# Altium PCB FlowSense-RX.PcbDoc
Units mil, origin at the board's own origin, x right, y up, seen from the top; angles counter-clockwise.
Board outline 1180.62 x 1020.62 mil, 2 copper layers (L1, L2), stack 62.8 mil thick; 31 components, 24 nets, 145 pads, 44 vias.
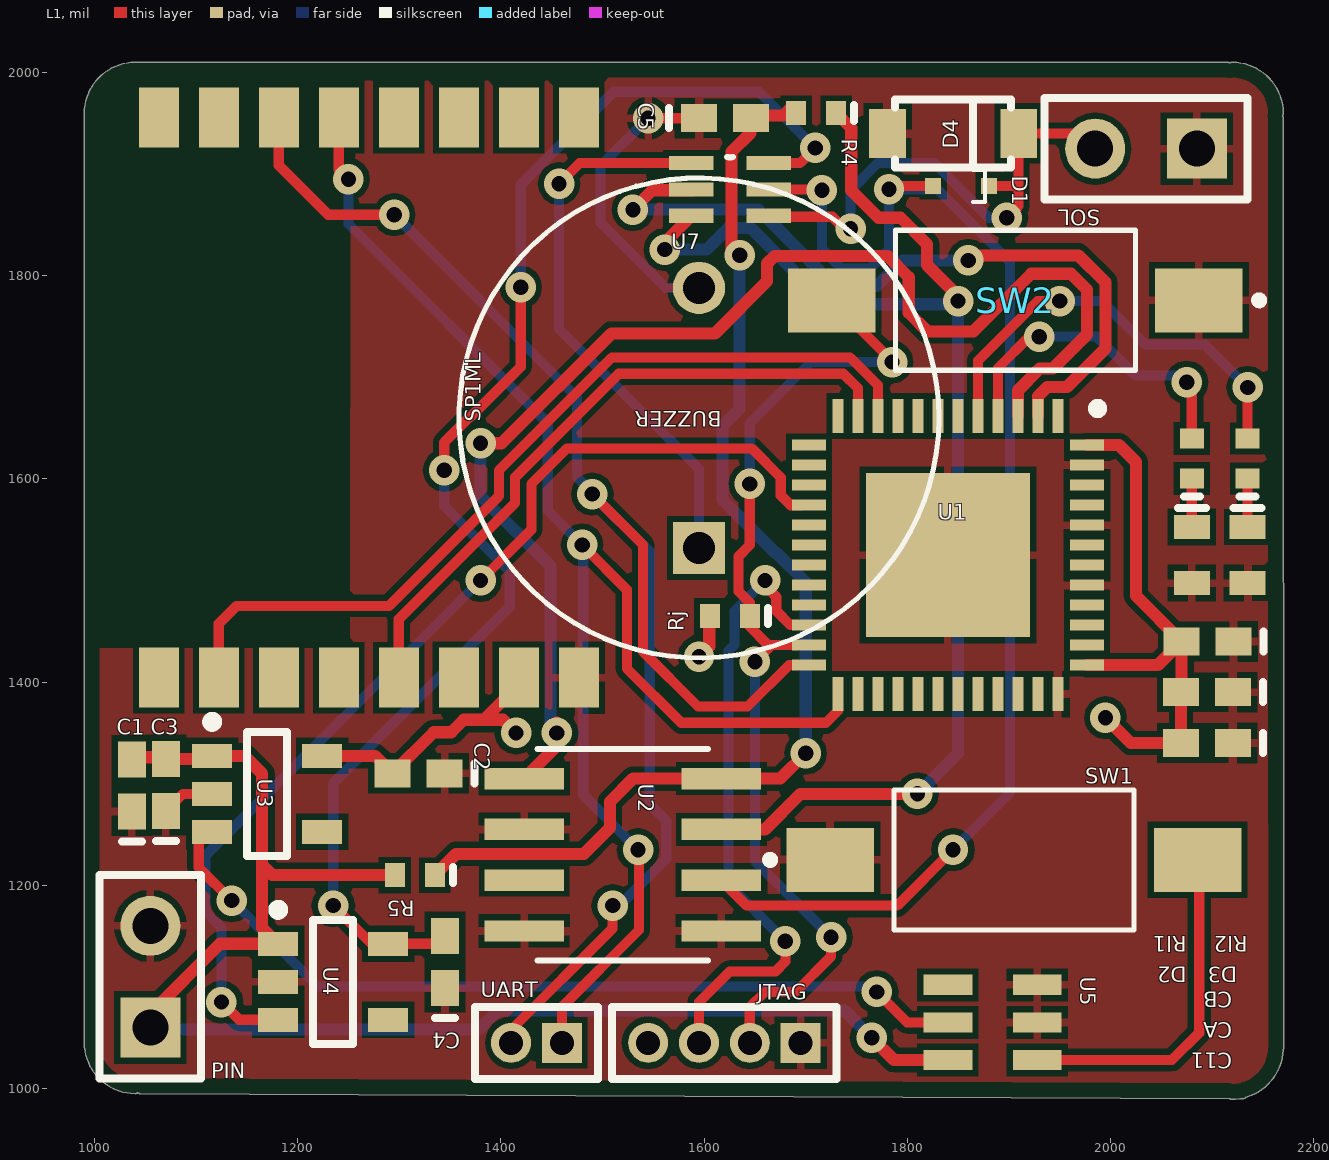
[diagram p0: L1 view]
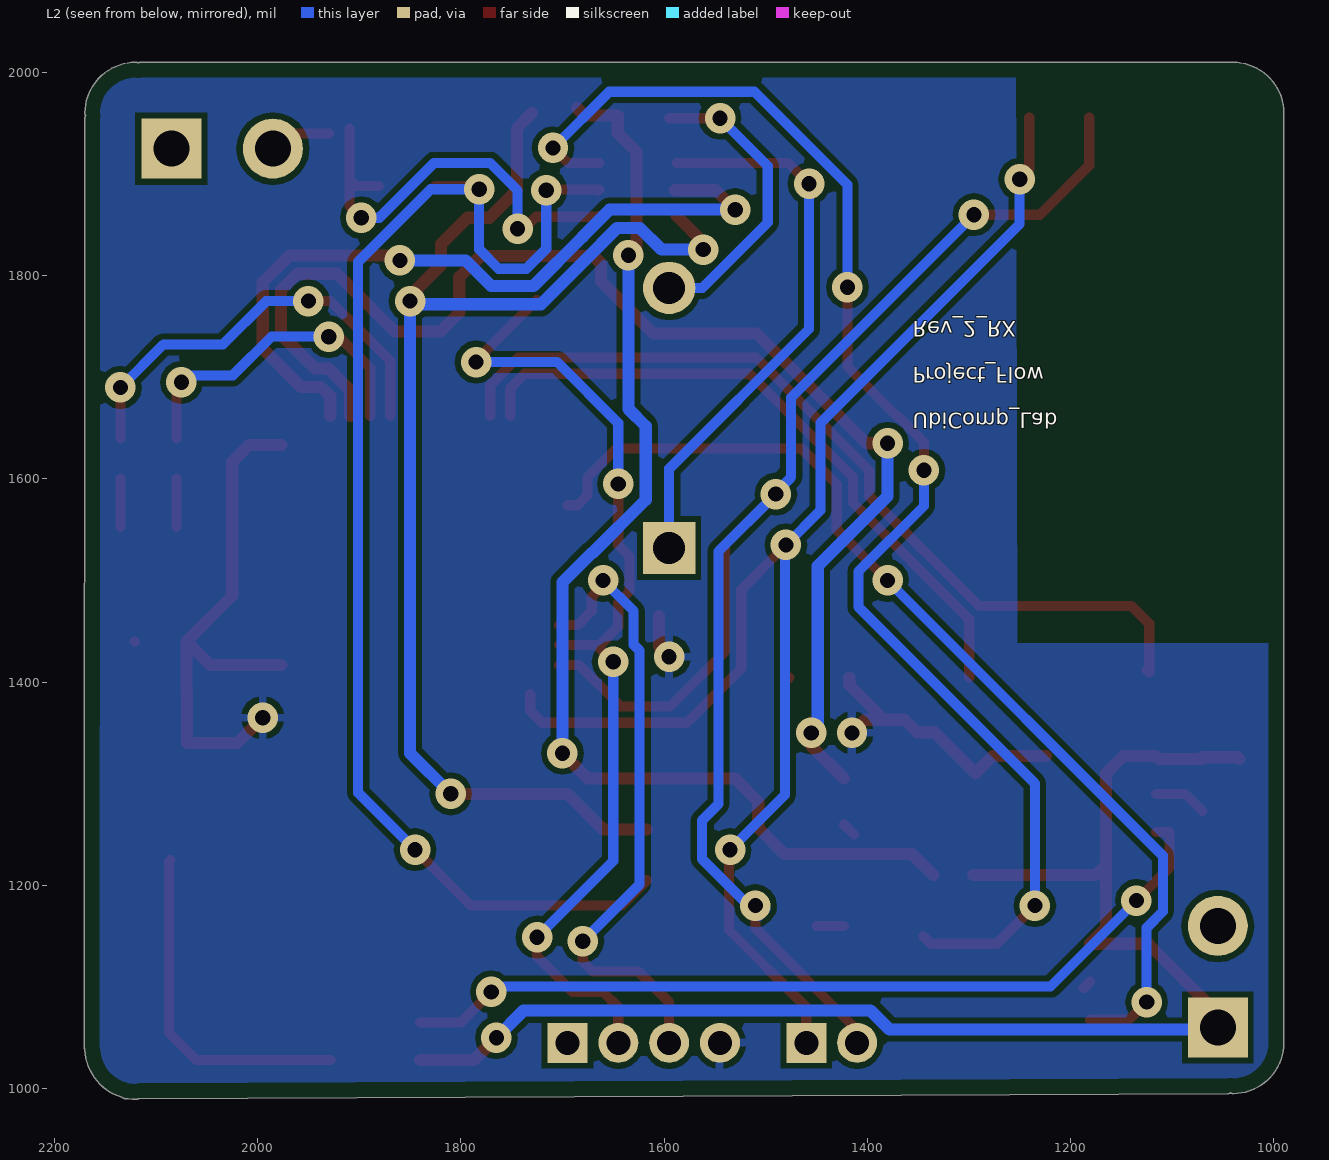
[diagram p1: L2 view, seen from below]

## Layer stack, top to bottom
Top Solder: solder mask 0.1, Solder Resist, Dk 0
L1: signal copper 1.4
Core: dielectric 60, FR-4, Dk 4.6
L2: signal copper 1.4
Bottom Solder: solder mask 0.1, Solder Resist, Dk 0

## Board outline
1040,994.99 ccw(c1040,1000) 1042.5,995.65 ccw(c1045,1000) 1044.98,994.99 2116.95,990.05 ccw(c2119.41,994.41) 2119.41,989.4 ccw(c2119.41,1040) 2127.18,990 2129.98,989.99 ccw(c2130,995) 2133.49,991.4 ccw(c2119.41,1040) 2169.98,1038.17 ccw(c2165.59,1040.59) 2170.6,1040.59 ccw(c2165.59,1040.59) 2170.6,1040.59 2170.01,1955 ccw(c2165,1955) 2169.35,1957.5 ccw(c2165,1960) 2170.01,1960 ccw(c2120,1960) 2120,2010.02 ccw(c2120,2005) 2117.5,2009.35 ccw(c2115,2005) 2115,2010.02 1040,2010.02 ccw(c1040,1960) 989.99,1960 989.99,1045 ccw(c1040,1045)

## Design rules (kind name [scope] priority, off if disabled: settings)
BoardOutlineClearance [All] p1: gap=15 ignorepadtopadclearanceinfootprint=FALSE
Clearance [All] p1: gap=6 ignorepadtopadclearanceinfootprint=FALSE except(0: Arc-Hole Track-Hole SMDPad-Hole THPad-Hole Via-Hole Fill-Hole Poly-Hole Region-Hole Text-Hole)
ComponentClearance [All] p1: gap=1 collisioncheckmode=3 verticalgap=1 showdistances=FALSE
DiffPairsRouting [All] p1: maxlimit=393.7 minlimit=6 mostfreqgap=8 toplayer_minwidth=6 toplayer_maxwidth=15 toplayer_prefwidth=8 bottomlayer_minwidth=6 bottomlayer_maxwidth=15 bottomlayer_prefwidth=8 maxuncoupledlength=500
HoleSize [All] p1: absolutevalues=TRUE maxlimit=265 minlimit=13 maxpercent=80.000 minpercent=20.000
HoleToHoleClearance [All] p1: gap=10 allowstackedmicrovias=FALSE
MinimumAnnularRing [All] p1: minimumring=7
MinimumSolderMaskSliver [All] p1: minsoldermaskwidth=0
PlaneClearance [All] p1: clearance=10
PlaneConnect [All] p1: planeconnectstyle=Direct reliefexpansion=16 reliefentries=4 reliefconductorwidth=6 reliefairgap=6
PolygonConnect [All] p1: connectstyle=Relief reliefconductorwidth=8 reliefentries=4 polygonreliefangle="90 Angle" airgapwidth=6
RoutingCorners [All] p1: cornerstyle=45-Degree minsetback=49.21 maxsetback=49.21
RoutingVias [All] p1: holewidth=15 width=30 viastyle="Through Hole" minholewidth=13 minwidth=27 maxholewidth=100 maxwidth=114
SilkToSilkClearance [All] p1: silktosilkclearance=0
SilkToSolderMaskClearance [IsPad] p1: minsilkscreentomaskgap=6 clearancetoexposedcopper=TRUE
SolderMaskExpansion [All] p1: expansion=2.95
Width [All] p1: maxlimit=400 minlimit=6 preferedwidth=8
20 further rules are at their usual default settings.

## Classes and differential pairs
component class peripheral: C1 C2 C3 C4 C5 D1 D4 PIN R4 R5 SOL SP1ML SW1 U2 U3 U4 U5 UART
component class MSP430: BUZZER C11 CA CB D2 D3 JTAG Rj Rl1 Rl2 SW2 U1 U7

## Components (designator, comment, footprint, x,y, rotation, side; value= is the part's Value field where it differs from the comment)
BUZZER "MCKPM-G1201A-K4037" XDCR_MCKPM-G1201A-K4037 1595,1660 r90 top locked
C1 "Cap" 0402-W 1036.7,1298.2 r90 top value=1u
C2 "Cap" 0402-W 1319,1310.22 r180 top value=100pF
C3 "Cap" 0402-W 1070.3,1298.71 r90 top value=1u
C4 "Cap" 0402-W 1345,1124.41 r90 top value=2.2u
C5 "Cap" 0402-W 1620.59,1955 r0 top value=100uF
C11 "Cap" 0402-W 2095,1340 r180 top value=4.7uF
CA "Cap" 0402-W 2095,1390 r180 top value=10u
CB "Cap" 0402-W 2095.59,1440 r180 top value=0.1u
D1 "Diode - Zener" SOD-523 1853.1,1888.4 r270 top
D2 "SML-311UTT86" 0603 2080,1525 r270 top
D3 "SML-311UTT86" 0603 2135,1525 r270 top
D4 "Diode" "DIODE - SOD123" 1845,1940 r0 top
JTAG "MHDR1X4" MHDR1X4 1695,1045 r180 top
PIN "Header 2" HDR1X2 1055,1060 r90 top
R4 "R_Pullup_1" 0402 1710.32,1960 r180 top value=47R
R5 "R_Pullup_1" 0402 1315.32,1210 r180 top value=DNP
Rj "Res" 0402 1625.32,1465 r180 top
Rl1 "Res" 0402 2080,1620 r90 top value=470
Rl2 "Res" 0402 2135,1620 r90 top value=470
SOL "Header 2" HDR1X2 2085,1925 r180 top
SP1ML "SP1ML-868" STM_SP1ML-868 1270,1680 r90 top locked
SW1 "FSMSM _1437566-3_" TE_FSMSM 1905,1225 r0 top
SW2 "FSMSM _1437566-3_" TE_FSMSM 1906.31,1775.8 r180 top
U1 "MSP430 Wolverine 48-Pin" MSP_QFN48_RGZ_PAD0 1840,1525 r270 top
U2 "LTC1154HS8TRPBF" SOIC-8_S 1520,1230 r0 top
U3 "TPS709" SOT95P280X145-5N 1170,1290 r0 top
U4 "TPS709" SOT95P280X145-5N 1235,1105 r0 top
U5 "MAX16054AZTT" 21-0114C 1884,1065 r180 top
U7 "BC857BS-7-F" SOT65P210X100-6N 1625.5,1884.9 r0 top
UART "MHDR1X2" MHDR1X2 1460,1045 r180 top

## Footprints (in the part's own frame and the unit in brackets; to place one, negate y for a bottom-side part, rotate by r counter-clockwise, add the part's x,y. Pads: shape width x height; smd on the part's side, far side on the other; paste and mask are expansions set on the pad)
21-0114C [mil]
  rect 48x20 smd: 1(-44,37) 2(-44,0) 3(-44,-37) 4(44,-37) 5(44,0) 6(44,37)
0402 [mm] "Surface Mount; Body 1 x 0.5 mm (LxW typ)"
  rect 0.5x0.6 smd: 1(-0.5,0) 2(0.5,0)
  silkscreen extent -0.95,-0.2 -0.95,0.2, body extent -0.5,-0.25 0.5,0.25, height 0.5
0402-W [mm] "Surface Mount - Wide; Body 1.0 x 0.5 mm (LxW typ)"
  rect 0.9x0.7 smd: 1(-0.65,0) 2(0.65,0)
  silkscreen extent -1.4,-0.25 -1.4,0.25, body extent -0.5,-0.25 0.5,0.25, height 0.5
0603 [mm] "Surface Mount; Body 1.6 x 0.8 mm (LxW typ)"
  rect 0.6x0.9 smd: 1(-0.7,0) 2(0.7,0)
  silkscreen extent -1.18,-0.35 -1.18,0.35, body extent -0.8,-0.4 0.8,0.4, height 0.8
"DIODE - SOD123" [mil] "SOD-123; 2 Leads; Body 2.7 x 1.6 mm, (LxW)"
  rect 36x48 smd: 1(-64.5,0) 2(64.5,0)
  silkscreen extent -57,-33 57,33, body extent -57,-33 57,33, height 91
HDR1X2 [mm] "Connector; Header; 2 Position"
  rect 1.5x1.5 hole 0.9: 1(0,0)
  round 1.5 hole 0.9: 2(2.54,0)
  silkscreen extent -1.27,-1.27 3.81,1.27
MHDR1X2 [mm] "Connector; Header; 2 Position"
  rect 1x1 hole 0.6: 1(0,0)
  round 1 hole 0.6: 2(1.27,0)
  silkscreen extent -0.9,-0.9 2.17,0.9
MHDR1X4 [mm] "Connector; Header; 4 Position"
  rect 1x1 hole 0.6: 1(0,0)
  round 1 hole 0.6: 2(1.27,0) 3(2.54,0) 4(3.81,0)
  silkscreen extent -0.9,-0.9 4.71,0.9
MSP_QFN48_RGZ_PAD0 [mm]
  rect 4.1x4.1 smd: 0(0,0)
  rect 0.85x0.28 smd: 1(-3.475,2.75) 2(-3.475,2.25) 3(-3.475,1.75) 4(-3.475,1.25) 5(-3.475,0.75) 6(-3.475,0.25) 7(-3.475,-0.25) 8(-3.475,-0.75) 9(-3.475,-1.25) 10(-3.475,-1.75) 11(-3.475,-2.25) 12(-3.475,-2.75) 25(3.475,-2.75) 26(3.475,-2.25) 27(3.475,-1.75) 28(3.475,-1.25) 29(3.475,-0.75) 30(3.475,-0.25) 31(3.475,0.25) 32(3.475,0.75) 33(3.475,1.25) 34(3.475,1.75) 35(3.475,2.25) 36(3.475,2.75)
  rect 0.28x0.85 smd: 13(-2.75,-3.475) 14(-2.25,-3.475) 15(-1.75,-3.475) 16(-1.25,-3.475) 17(-0.75,-3.475) 18(-0.25,-3.475) 19(0.25,-3.475) 20(0.75,-3.475) 21(1.25,-3.475) 22(1.75,-3.475) 23(2.25,-3.475) 24(2.75,-3.475) 37(2.75,3.475) 38(2.25,3.475) 39(1.75,3.475) 40(1.25,3.475) 41(0.75,3.475) 42(0.25,3.475) 43(-0.25,3.475) 44(-0.75,3.475) 45(-1.25,3.475) 46(-1.75,3.475) 47(-2.25,3.475) 48(-2.75,3.475)
  silkscreen extent -3.78,3.63 -3.55,3.85, body extent -3.3,-3.3 3.3,3.3, height 1
SOD-523 [mm] "SOD-523 Footprint"
  rect 0.4x0.4 smd: 1(0,0.7) 2(0,-0.7)
  silkscreen extent -0.4,0.3 0.4,0.6, body extent -0.4,-0.6 0.4,0.6, height 1
SOIC-8_S [mil]
  rect 78x21 smd: 1(-97,75) 2(-97,25) 3(-97,-25) 4(-97,-75) 5(97,-75) 6(97,-25) 7(97,25) 8(97,75)
  silkscreen extent -84,-104 84,104
SOT65P210X100-6N [mil]
  rect 44x14 smd: 1(-38,26) 2(-38,0) 3(-38,-26) 4(38,-26) 5(38,0) 6(38,26)
  silkscreen extent -3,32 3,32
SOT95P280X145-5N [mm] "SOT23, 5-Leads, Body 2.90x2.80mm, Pitch 0.95mm, IPC Medium Density"
  rect 1x0.6 smd: 1(-1.375,0.95) 2(-1.375,0) 3(-1.375,-0.95) 4(1.375,-0.95) 5(1.375,0.95)
  silkscreen extent -1.5,-1.55 0.5,1.92, body extent -0.88,-1.52 0.87,1.53, height 1.45
STM_SP1ML-868 [mm]
  rect 1.5x1 smd: 1(-7,5.25) 2(-7,3.75) 3(-7,2.25) 4(-7,0.75) 5(-7,-0.75) 6(-7,-2.25) 7(-7,-3.75) 8(-7,-5.25) 9(7,-5.25) 10(7,-3.75) 11(7,-2.25) 12(7,-0.75) 13(7,0.75) 14(7,2.25) 15(7,3.75) 16(7,5.25)
TE_FSMSM [mm]
  rect 2.19x1.6 smd: 1(-4.59,0) 2(4.59,0)
  silkscreen extent -6.2,-1.75 3,1.75
XDCR_MCKPM-G1201A-K4037 [mm]
  rect 1.308x1.308 hole 0.8: 1(-3.25,0)
  round 1.308 hole 0.8: 2(3.25,0)
  silkscreen extent -6,-6 6,6

## Part data
BUZZER: "Magnetic Buzzer And Transducer", Package=None, Availability=Unavailable, MF=Multicomp, MP=MCKPM-G1201A-K4037, Price="0.24 USD"
C1 C2 C3 C4 C5 C11 CA CB: "Ceramic Capacitor (Surface Mount)", Manufacturer="Generic Ceramic Chip Cap (TBD)"
D2 D3: "LED 630NM RED WTR CLR 0603 SMD"
D4: "General Purpose Diode"
JTAG: "Header, 4-Pin", LatestRevisionDate=17-Jul-2002, LatestRevisionNote="Re-released for DXP Platform.", Publisher="Altium Limited"
PIN SOL UART: "Header, 2-Pin", LatestRevisionDate=17-Jul-2002, LatestRevisionNote="Re-released for DXP Platform.", Publisher="Altium Limited"
R4 R5: library part Res, "Chip Resistor (Surface Mount)", Manufacturer="Generic Chip Res (TBD)", Comment_1=Res
Rj Rl1 Rl2: "Chip Resistor (Surface Mount)", Manufacturer="Generic Chip Res (TBD)"
SP1ML: "RF TXRX MODULE ISM<1GHZ CHIP ANT", Package="SMD-16 STMicroelectronics", Availability=Good, MF=STMicroelectronics, MP=SP1ML-868, Price="16.88 USD"
SW1 SW2: library part FSMSM, "FSMSM=3.5X6 SMT TACT", Package=None, Availability=Unavailable, MF="TE Connectivity", MP=FSMSM, Price=None, SnapEDA_Link=https://www.snapeda.com/parts/FSMSM/TE%20Connectivity%20/%20DEUTSCH/view-part/?ref=snap
U1: library part MSP430FR596X_586X_RGZ, "16-bit FRAM MCU"
U2: "IC MOSFET DRIVER HIGH-SIDE 8SOIC", Package="SOIC-8 Linear Technology", Availability=Unavailable, MF="Linear Technology", MP=LTC1154HS8#TRPBF, Price="2.92 USD"
U3 U4: "Ultra low power Voltage Regulator"
U5: "On/Off Controller With Debounce And +/-1", Package="TSOT-23 Maxim Integrated", Availability=Unavailable, MF="Maxim Integrated", MP=MAX16054AZT+, Price="2.94 USD", SnapEDA_Link=https://www.snapeda.com/parts/MAX16054AZT%2B/Maxim%20Integrated/view-part/?ref=snap
U7: "BC857BS Series PNP 45 V 200 mW Small Signal Transistor SMT - SOT-363", Package="SOT-363 Diodes Inc.", Availability=Good, MF="Diodes Inc.", MP=BC857BS-7-F, Price="0.08 USD", SnapEDA_Link=https://www.snapeda.com/parts/BC857BS-7-F/Diodes%20Inc./view-part/?ref=snap

## Via types
v1: diameter 30, hole 15, L1 to L2, 44 vias

## Nets (pads, with @x,y where several pads share a name; then routed paths per layer and width w, separated by ;. In a path a pad name is that pad's centre, name@x,y a point inside that pad or via, vN(x,y) a via of type N, cw(c..) or ccw(c..) an arc to the next point about the centre after c; other vN are vias at no path point)
GND: BUZZER.2 C1.1 C2.1 C3.1 C4.1 C5.1 C11.1 CA.1 CB.1 D2.2 D3.2 D4.1 JTAG.1 PIN.2 SOL.1 SP1ML.8 SW1.1 SW2.1 U1.0 U1.36 U1.41 U1.44 U1.47 U2.2 U2.4 U2.5 U3.2 U4.2 U5.2 U5.3 | length 425.4
  L1 w10: C3.1 1087.18,1290 U3.2 ; U4.2 U4.2@1187.05,1098.82 ; U2.2@1413,1250 U2.2@1423,1260 ; U2.4@1423,1160 U2.4@1450,1160 ; SP1ML.8 SP1ML.8@1481,1400.1 ; v1(1544.9,1955) C5.1 ; SOL.1@2070,1940 SOL.1@2090,1940 ; CB.1@2120.59,1439.41 CB.1
  L2 w10: v1(1544.9,1955) 1497.9,1908 1497.9,1852.33 1562.28,1787.95 BUZZER.2
LED1: Rl1.2 U1.4 | length 322
  L1 w10: U1.4 1889.21,1709.21 1920,1740 v1(1930,1740) ; v1(2075,1695) 2080,1690 Rl1.2
  L2 w10: v1(1930,1740) 1986.3,1740 2024.4,1701.9 2068.1,1701.9 v1(2075,1695)
LED2: Rl2.2 U1.5 | length 429.8
  L1 w10: U1.5 1869.53,1716.3 1928.23,1775 v1(1950,1775) ; Rl2.2 v1(2135,1690)
  L2 w10: v1(1950,1775) 1991.5,1775 2034.28,1732.22 2092.78,1732.22 v1(2135,1690)
NetBUZZER_1: BUZZER.1 U7.1 | length 554.2
  L1 w10: v1(1457.3,1890.6) 1477.6,1910.9 U7.1
  L2 w10: v1(1457.3,1890.6) 1457.3,1747.6 1595,1609.9 BUZZER.1
NetC1_2: C1.2 C3.2 PIN.1 R5.2 U3.1 U4.1 U5.6 | length 1431.4
  L1 w12: C1.2@1033.7,1324.28 1035.52,1326.1 C3.2@1070.3,1326.1 ; PIN.1 1055,1073.9 1123.5,1142.4 U4.1 1165,1158.27 1165,1220 ; C3.2 1112.76,1324.3 U3.1 1147.6,1327.4 1165,1310 1165,1220 ; R5.2 1175,1210 1165,1220 ; v1(1765,1050) 1787,1028 U5.6
  L2 w12: PIN.1 1057,1058 1378.19,1058 1396.88,1076.69 1738.31,1076.69 v1(1765,1050)
NetC5_2: C5.2 R4.2 R5.1 U2.8 | length 1167.9
  L1 w12: R5.1 1355.9,1230.9 1481.6,1230.9 1507.3,1256.6 1507.3,1282.3 1530,1305 U2.8 1675,1305 v1(1700,1330) ; v1(1635,1820) 1635,1812.59 1627,1820.59 1627,1921.97 1645.59,1940.56 1645.59,1957.76 1678.39,1957.76 R4.2@1685.63,1965
  L2 w12: v1(1635,1820) 1635,1668.84 1618,1651.84 1618,1579.4 1670.4,1527 1671.18,1527 1700,1498.18 v1(1700,1330)
NetD1_1: D1.1 D4.2 SOL.2 U7.4 | length 495.5
  L1 w10: U7.4 1664.4,1858 1726.1,1858 1737.8,1846.3 v1(1744.2,1846.3) ; D1.1 1903.6,1888.4 1909.5,1894.3 ; v1(1898,1857) 1909.5,1868.5 1909.5,1894.3 ; D4.2@1909.5,1945 D4.2 1909.5,1894.3 ; 1929.5,1940 SOL.2@1990,1940
  L2 w10: v1(1744.2,1846.3) 1744.2,1883.97 1771.23,1911 1826.33,1911 1880.33,1857 v1(1898,1857)
NetD1_2: D1.2 U2.6 U7.5 | length 1308.7
  L1 w10: U2.6 1642,1180 1790,1180 v1(1845,1235) ; U7.5 1715.1,1884.9 v1(1716,1884) ; U7.5@1665.3,1884.4 U7.5@1665.7,1884 ; v1(1782,1885) 1785.4,1888.4 D1.2
  L2 w10: v1(1716,1884) 1716,1826.4 1735.5,1806.9 1763,1806.9 1782,1825.9 v1(1782,1885) 1829.7,1885 1901.1,1813.6 1901.1,1291.1 v1(1845,1235)
NetD2_1: D2.1 Rl1.1 | length 47.8
  L1 w10: D2.1 Rl1.1
NetD3_1: D3.1 Rl2.1 | length 47.8
  L1 w10: D3.1 Rl2.1
NetR4_1: R4.1 U2.7 U7.3 | length 1335.3
  L1 w12: v1@1558,1822.4 v1(1561.3,1825.7) 1561.3,1832.7 U7.3 ; U2.7 1660,1255 1695,1290 v1(1810,1290) ; R4.1 1744.87,1945.13 1744.87,1883.82 1771.68,1857 1793.46,1857 1819.5,1830.95 1819.5,1810.5 1850,1780 v1(1850,1775)
  L2 w12: v1(1561.3,1825.7) 1602.52,1825.7 1623.82,1847 1646.18,1847 1662,1831.18 1662,1830.9 1721,1771.9 1846.9,1771.9 v1(1850,1775) 1850,1330 v1(1810,1290)
NetSP1ML_2: SP1ML.2 U1.10 | length 865.5
  L1 w10: SP1ML.2@1125,1412.05 1122.36,1409.41 1122.36,1457.36 1140,1475 1290,1475 1398,1583 1398,1608.25 1509.25,1719.5 1743.73,1719.5 1771.1,1692.13 U1.10
NetSP1ML_5: SP1ML.5 U1.11 | length 657.6
  L1 w10: SP1ML.5 1299.53,1461.9 1414,1576.37 1414,1601.63 1515.88,1703.5 1737.1,1703.5 1751.42,1689.19 U1.11
NetSP1ML_13: SP1ML.13 U1.25 UART.1 | length 1459.7
  L1 w10: SP1ML.13 1240.47,1904.53 v1(1250,1895) ; UART.1 1460,1080 1536,1156 1536,1231 1532,1235 v1(1535,1235) ; v1(1480,1535) 1524,1491 1524,1413.37 1577.37,1360 1720,1360 1731.73,1371.73 U1.25
  L2 w10: v1(1250,1895) 1250,1850.91 1446.1,1654.81 1446.1,1568.9 v1(1480,1535) 1481,1534 1481,1289 v1(1535,1235)
NetSP1ML_14: SP1ML.14 U1.24 UART.2 | length 1569
  L1 w10: SP1ML.14 1181.42,1908.58 1230,1860 v1(1295,1860) ; UART.2 1410,1057.6 1510,1157.6 v1(1510,1180) ; v1(1490,1585) 1540,1535 1540,1430 1594,1376 1642.77,1376 1683.5,1416.73 U1.24
  L2 w10: v1(1295,1860) 1474.9,1680.1 1474.9,1601.7 1490,1586.6 v1(1490,1585) 1546.5,1528.5 1546.5,1279.9 1562.8,1263.6 1562.8,1226.03 1506.77,1170 v1@1500,1176.77
NetSW1_2: SW1.2 U5.1 | length 341.2
  L1 w10: U5.1 2060.4,1028 2087.3,1054.9 2087.3,1223.41 SW1.2
NetU1_2: U1.2 U7.2 | length 756.7
  L1 w12: v1(1530,1865) 1549,1884 1586.6,1884 U7.2 ; U7.2@1588.9,1884 U7.2@1589.3,1884.4 ; v1(1860,1815) 1865,1820 1968.64,1820 1995,1793.64 1995,1728.23 1957.31,1690.54 1937.79,1690.54 1928.58,1681.34 U1.2
  L2 w12: v1(1530,1865) 1653.64,1865 1680,1838.64 1680,1838.36 1728.46,1789.9 1770.04,1789.9 1795.14,1815 v1(1860,1815)
NetU1_3: U1.3 U2.1 | length 1309.7
  L1 w12: v1(1380,1635) 1400.7,1635 1508.86,1743.16 1610.64,1743.16 1662,1794.52 1662,1812 1669.5,1819.5 1726.42,1819.5 1726.62,1819.3 1780.7,1819.3 1801.5,1798.5 1801.5,1763.5 1820,1745 1865,1745 1906.17,1786.17 1922,1802 1961.18,1802 1977,1786.18 1977,1742 1943.54,1708.54 1930.33,1708.54 1908.9,1687.11 U1.3 ; U2.1 1455,1337 v1(1455,1350) v1@1455,1359.92
  L2 w12: v1(1380,1635) 1380,1582.9 1448.7,1514.2 1448.7,1356.3 v1(1455,1350)
NetU1_16: U1.16 U4.3 | length 1025.6
  L1 w10: v1(1125,1085) 1142.4,1067.6 U4.3 ; v1(1380,1500) 1430,1550 1430,1595 1465,1630 1646.77,1630 1675.46,1601.31 1675.46,1583.83 1685.23,1574.05 U1.16@1695,1574.05
  L2 w10: v1(1125,1085) 1125,1158.23 1109,1174.23 1109,1229 v1(1380,1500)
NetU3_3: U3.3 U5.5 | length 849
  L1 w10: U3.3 1102.6,1252.6 1102.6,1217.4 v1(1135,1185) ; v1(1770,1095) 1800,1065 U5.5
  L2 w10: v1(1135,1185) 1219.6,1100.4 1764.6,1100.4 v1(1770,1095)
RST: JTAG.2 Rj.1 SW2.2 U1.23 | length 1005.3
  L1 w10: JTAG.2 1645,1080 1660,1095 1690,1095 1725,1130 v1(1725,1148.9) ; v1(1645,1595) 1645,1535 1634,1524 1634,1489.23 1645,1478.23 Rj.1 1645,1454.69 1663.27,1436.42 1666.42,1436.42 ; v1(1650,1420) 1666.42,1436.42 ; U1.23 1666.42,1436.42 ; SW2.2 1785,1716.4 v1(1785,1715)
  L2 w10: v1(1645,1595) 1645,1654.8 1705.2,1715 v1(1785,1715) ; v1(1650,1420) 1650,1223.9 v1(1725,1148.9)
TEST: JTAG.3 U1.22 | length 627.1
  L1 w10: JTAG.3 1595,1085 1625,1115 1670,1115 1680,1125 v1(1680,1145) ; v1(1660,1500) 1660,1495 1671.1,1483.9 1671.1,1470.08 1685.08,1456.1 U1.22
  L2 w10: v1(1660,1500) 1629.9,1469.9 1629.9,1436.67 1624,1430.77 1624,1201 v1(1680,1145)
VCC_3.3: C2.2 C11.2 CA.2 CB.2 JTAG.4 Rj.2 SP1ML.7 U1.37 U1.48 U3.5 | length 870.3
  L1 w12: U3.5 1276.23,1327.4 C2.2 1333.84,1350.65 1351.14,1350.65 1363.37,1362.88 1383.24,1362.88 ; v1(1415,1350) 1402.12,1362.88 1383.24,1362.88 ; SP1ML.7 1417.64,1397.28 1383.24,1362.88 ; JTAG.4 JTAG.4@1550,1050 ; v1(1595,1425) 1605,1435 Rj.2@1605,1465 ; U1.37 2046.73,1416.73 CB.2 ; U1.48 2008.27,1633.27 2025,1616.54 2025,1485 CB.2 ; v1(1995,1365) 2020,1340 C11.2 CA.2 2070,1390.59 CB.2
VCC_5: C4.2 U4.5 U7.6 | length 1371.2
  L1 w10: v1(1235,1180) 1272.6,1142.4 U4.5 1337.4,1142.4 C4.2 ; v1(1344.2,1608.4) 1344.2,1635.97 1369.23,1661 1370.2,1661 1419.5,1710.3 v1(1419.5,1788.6) ; U7.6 1694.5,1910.9 v1(1709.3,1925.7)
  L2 w10: v1(1235,1180) 1235,1300.3 1408.7,1474 1408.7,1508.8 1344.2,1573.3 v1(1344.2,1608.4) ; v1(1419.5,1788.6) 1419.5,1889.57 1510.93,1981 1654,1981 v1(1709.3,1925.7)
pads on no net: SP1ML.1 SP1ML.3 SP1ML.4 SP1ML.6 SP1ML.9 SP1ML.10 SP1ML.11 SP1ML.12 SP1ML.15 SP1ML.16 U1.1 U1.6 U1.7 U1.8 U1.9 U1.12 U1.13 U1.14 U1.15 U1.17 U1.18 U1.19 U1.20 U1.21 U1.26 U1.27 U1.28 U1.29 U1.30 U1.31 U1.32 U1.33 U1.34 U1.35 U1.38 U1.39 U1.40 U1.42 U1.43 U1.45 U1.46 U2.3 U3.4 U4.4 U5.4

## Polygon pours and split planes (outlines as drawn)
GND on L1 "L1-GND" (solid, pour order 8): 1252.7,2003.3 1255.2,2005.8 2166.6,2005.8 2166.6,983.5 989.6,983.5 989.6,1399.9 965.9,1423.6 975.8,1433.5 1251.5,1433.5
VCC_3.3 on L2 "L1-VCC_3.3" (solid, pour order 10): 1253.7,2008 1256.2,2010.5 2167.6,2010.5 2167.6,988.2 990.6,988.2 990.6,1404.6 966.9,1428.3 976.8,1438.2 1252.5,1438.2

## Silkscreen, mask and mechanical layers (free items; w line width, h text height)
Bottom Overlay:
  text "Rev_2_RX" at 1355,1755 h15 r180
  text "Project_Flow" at 1355,1710 h15 r180
  text "UbiComp_Lab" at 1355,1665 h15 r180
Mechanical 1:
  lines w10: 1040,1000 cw(c1040,1045) 995,1045 995,1960 cw(c1040,1960) 1040,2005 2115,2005 ; 1045,1000 2130,995 ; 2119.41,994.41 ccw(c2119.41,1040) 2165,1040 ; 2120,2005 cw(c2120,1960) 2165,1960 ; 2165,1955 2165.59,1040.59